# Altium PCB NBP6 Altera Stratix BGA780 Rev1.00.PcbDoc (part 3 of 3)
Units mm, origin at the board's own origin, x right, y up, seen from the top; angles counter-clockwise.
Board outline 69 x 80.99 mm, 6 copper layers (Top Layer, Upper, lower, VCC_PLANE, GND_PLANE, Bottom Layer); 92 components, 279 nets, 1271 pads, 560 vias.
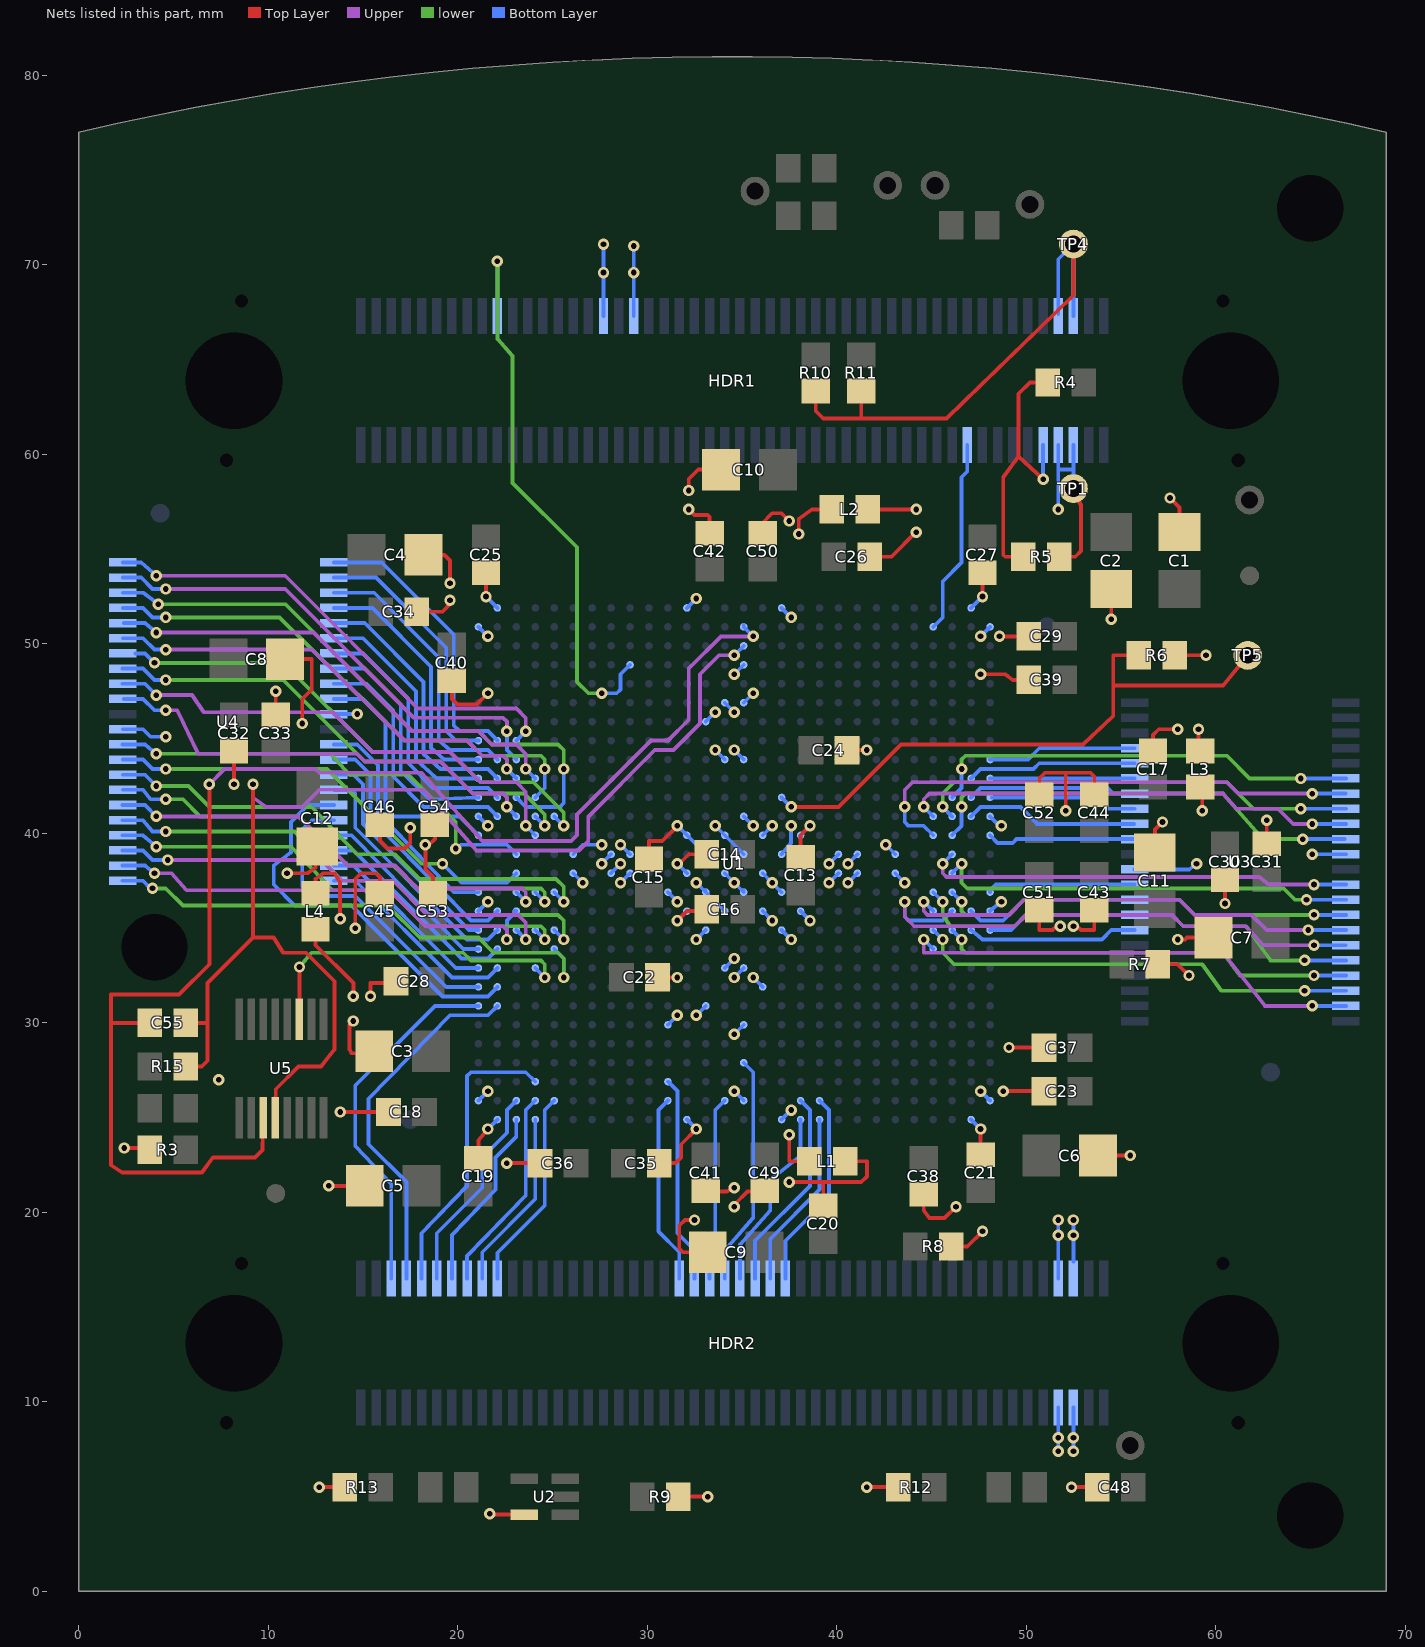
[diagram p7: the nets of this part, all layers, seen from the top]

## Via types
v1: diameter 0.6, hole 0.3, Top Layer to Bottom Layer, 560 vias

## Nets (pads, with @x,y where several pads share a name; then routed paths per layer and width w, separated by ;. In a path a pad name is that pad's centre, name@x,y a point inside that pad or via, vN(x,y) a via of type N, cw(c..) or ccw(c..) an arc to the next point about the centre after c; other vN are vias at no path point) (continued)
SRAM0_A15: U1.W4 U3.21 | length 25.1
  Upper w0.2: v1(44.6,34.4) 44.6,33.7 60.4,33.7 62.6,30.9 v1(65.1,30.9)
  Bottom Layer w0.2: v1(44.6,34.4) U1.W4@45.1,33.9 ; v1(65.1,30.9) U3.21@66.9,30.9
SRAM0_A16: U1.V4 U3.20 | length 23.9
  lower w0.2: v1(45.6,34.4) 45.6,33.7 46.2,33.1 59.3,33.1 60.3,31.7 v1(64.7,31.7)
  Bottom Layer w0.2: U1.V4@45.1,34.9 v1(45.6,34.4) ; v1@64.5,31.7 U3.20@66.9,31.7
SRAM0_A17: U1.V3 U3.19 | length 22.2
  lower w0.2: v1(46.6,34.4) 46.6,33.9 46.8,33.7 60.4,33.7 61.3,32.5 v1(65.2,32.5)
  Bottom Layer w0.2: U1.V3@46.1,34.9 v1(46.6,34.4) ; v1(65.2,32.5) U3.19@66.9,32.5
SRAM0_A18: U1.T4 U3.18 | length 24.4
  lower w0.2: v1(45.6,36.4) 45.6,35.7 46,35.1 49.4,35.1 50,35.7 57.7,35.7 58.3,35.1 61.6,35.1 62.9,33.3 v1(64.7,33.3)
  Bottom Layer w0.2: U1.T4@45.1,36.9 v1(45.6,36.4) ; v1(64.7,33.3) U3.18@66.9,33.3
SRAM0_D0: U1.N4 U3.7 | length 27.2
  Upper w0.2: v1(43.6,41.4) 43.6,42.3 44,42.7 60.6,42.7 61.2,42.1 v1(65.1,42.1)
  Bottom Layer w0.2: v1(43.6,41.4) 43.6,40.6 43.8,40.4 44.6,40.4 U1.N4@45.1,39.9 ; v1(65.1,42.1) U3.7@66.875,42.1
SRAM0_D1: U1.M3 U3.8 | length 23.5
  lower w0.2: v1(45.6,41.4) 45.6,42.1 46.2,42.7 60.6,42.7 62,41.3 v1(64.5,41.3)
  Bottom Layer w0.2: v1(45.6,41.4) U1.M3@46.1,40.9 ; v1(64.5,41.3) U3.8@66.9,41.3
SRAM0_D2: U1.M4 U3.9 | length 24.2
  Upper w0.2: v1(44.6,41.4) 44.6,41.8 44.9,42.1 60.4,42.1 61.1,41.3 63.3,41.3 64.1,40.5 v1(65.1,40.5)
  Bottom Layer w0.2: v1(44.6,41.4) U1.M4@45.1,40.9 ; v1(65.1,40.5) U3.9@66.9,40.5
SRAM0_D3: U1.N3 U3.10 | length 23.6
  lower w0.2: v1(46.6,41.4) 46.6,41.9 46.8,42.1 60.4,42.1 62.5,39.7 v1(64.6,39.7)
  Bottom Layer w0.2: U1.N3@46.1,39.9 46.6,40.4 v1(46.6,41.4) ; v1(64.6,39.7) U3.10@66.8,39.7
SRAM0_D4: U1.P3 U3.13 | length 22.7
  Upper w0.2: v1(45.6,38.4) 45.6,37.9 45.8,37.7 62.3,37.7 62.8,37.3 v1(65.2,37.3)
  Bottom Layer w0.2: v1(45.6,38.4) U1.P3@46.1,38.9 ; v1(65.2,37.3) U3.13@66.9,37.3
SRAM0_D5: U1.R3 U3.14 | length 22.4
  lower w0.2: v1(46.6,38.4) 46.6,37.4 46.9,37.1 63.6,37.1 64.2,36.5 v1(64.8,36.5)
  Bottom Layer w0.2: U1.R3@46.1,37.9 v1(46.6,38.4) ; v1(64.8,36.5) U3.14@66.9,36.5
SRAM0_D6: U1.T3 U3.15 | length 22.3
  lower w0.2: v1(46.6,36.4) 46.6,35.9 46.8,35.7 49.1,35.7 49.9,36.5 58.1,36.5 58.9,35.7 v1(65.2,35.7)
  Bottom Layer w0.2: U1.T3@46.1,36.9 v1(46.6,36.4) ; v1(65.2,35.7) U3.15@66.9,35.7
SRAM0_D7: U1.U4 U3.16 | length 24.6
  Upper w0.2: v1(44.6,36.4) 44.6,35.9 44.8,35.7 49.1,35.7 49.9,36.5 58.1,36.5 58.9,35.7 61.9,35.7 62.7,34.9 v1@64.7,34.9
  Bottom Layer w0.2: v1(44.6,36.4) U1.U4@45.1,35.9 ; v1@64.7,34.9 U3.16@66.9,34.9
  other v1: 64.9,34.9
SRAM0_D8: U1.V2 U3.29 | length 9
  Bottom Layer w0.2: U1.V2@47.1,34.9 47.7,34.4 54,34.4 54.5,34.9 U3.29@55.725,34.9
SRAM0_D9: U1.V1 U3.30 | length 8
  Bottom Layer w0.2: U1.V1@48.1,34.9 49.2,34.9 50,35.7 U3.30@55.725,35.7
SRAM0_D10: U1.U2 U3.31 | length 9.3
  Bottom Layer w0.2: U1.U2@47.1,35.9 47.6,35.4 48.8,35.4 49.9,36.5 U3.31@55.725,36.5
SRAM0_D11: U1.T1 U3.32 | length 7.8
  Bottom Layer w0.2: U1.T1@48.1,36.9 48.1,37 48.4,37.3 U3.32@55.725,37.3
SRAM0_D12: U1.N1 U3.35 | length 7.9
  Bottom Layer w0.2: U1.N1@48.1,39.9 48.5,39.5 49.3,39.5 49.5,39.7 55.625,39.7 U3.35@55.725,39.7
SRAM0_D13: U1.M2 U3.36 | length 9.2
  Bottom Layer w0.2: U1.M2@47.1,40.9 47.6,41.4 49.7,41.4 50.6,40.5 ; 50.575,40.5 U3.36@55.7,40.5
SRAM0_D14: U1.L1 U3.37 | length 7.8
  Bottom Layer w0.2: U1.L1@48.2,41.9 53.7,41.9 54.3,41.3 U3.37@55.725,41.3
SRAM0_D15: U1.L2 U3.38 | length 9
  Bottom Layer w0.2: U1.L2@47.1,41.9 47.6,42.4 54.3,42.4 54.6,42.1 U3.38@55.725,42.1
SRAM0_E: U1.L3 U3.6 | length 23.1
  lower w0.2: v1(46.6,43.4) 46.6,43.9 46.8,44.1 60.6,44.1 61.8,42.9 v1(64.5,42.9)
  Bottom Layer w0.2: U1.L3@46.1,41.9 46.6,42.4 v1(46.6,43.4) ; v1(64.5,42.9) U3.6@66.9,42.9
SRAM0_LB: U1.K1 U3.39 | length 7.6
  Bottom Layer w0.2: U1.K1@48.1,42.9 U3.39@55.725,42.9
SRAM0_OE: U1.J1 U3.41 | length 7.9
  Bottom Layer w0.2: U1.J1@48.1,43.9 50.1,43.9 50.7,44.5 U3.41@55.725,44.5
SRAM0_UB: U1.K2 U3.40 | length 9
  Bottom Layer w0.2: U1.K2@47.1,42.9 47.6,43.4 50.4,43.4 50.7,43.7 U3.40@55.725,43.7
SRAM0_W: U1.U3 U3.17 | length 28.8
  Upper w0.2: v1(43.6,36.4) 43.6,35.6 44.1,35.1 49.4,35.1 50,35.7 57.7,35.7 58.3,35.1 61.6,35.1 62.5,34.1 v1(65.2,34.1)
  Bottom Layer w0.2: v1(43.6,36.4) 43.6,35.6 43.8,35.4 45.6,35.4 U1.U3@46.1,35.9 ; v1(65.2,34.1) U3.17@66.875,34.1
SRAM1_A0: U1.K27 U4.5 | length 14.2
  Bottom Layer w0.2: U4.5@13.475,51.1 15.1,51.1 18.2,48 18.2,44.2 19.1,43.4 21.6,43.4 U1.K27@22.1,42.9
SRAM1_A1: U1.J28 U4.4 | length 13.4
  Bottom Layer w0.2: U4.4@13.475,51.9 15.5,51.9 18.6,48.8 18.6,44.5 19.3,43.9 U1.J28@21.1,43.9
SRAM1_A2: U1.J27 U4.3 | length 14.8
  Bottom Layer w0.2: U4.3@13.475,52.7 15.6,52.7 19,49.3 19,44.9 19.6,44.4 21.6,44.4 U1.J27@22.1,43.9
SRAM1_A3: U1.H28 U4.2 | length 13.8
  Bottom Layer w0.2: U4.2@13.475,53.5 15.7,53.5 19.4,49.8 19.4,45.4 19.9,44.9 U1.H28@21.1,44.9
SRAM1_A4: U1.H27 U4.1 | length 15.3
  Bottom Layer w0.2: U4.1@13.475,54.3 16,54.3 19.8,50.5 19.8,45.7 20.1,45.4 21.6,45.4 U1.H27@22.1,44.9
SRAM1_A5: U1.H26 U4.44 | length 26.1
  Upper w0.2: v1(4.1,53.6) 10.9,53.6 17.9,46.6 23.1,46.6 23.6,46.1 v1(23.6,45.4)
  Bottom Layer w0.2: U4.44@2.325,54.3 3.3,54.3 v1(4.1,53.6) ; U1.H26@23.1,44.9 v1(23.6,45.4)
SRAM1_A6: U1.J26 U4.43 | length 25.7
  Top Layer w0.2: v1(4.6,52.9) v1@4.7,52.9
  Upper w0.2: v1(4.6,52.9) 10.9,52.9 17.7,46.1 22.4,46.1 22.6,45.9 v1(22.6,45.4)
  Bottom Layer w0.2: U4.43@2.325,53.5 3.3,53.5 3.9,52.9 v1(4.6,52.9) ; v1(22.6,45.4) 22.6,44.4 U1.J26@23.1,43.9
SRAM1_A7: U1.L26 U4.42 | length 32.2
  lower w0.2: v1(4.2,52.1) 10.9,52.1 17.6,45.4 21.1,45.4 21.8,44.7 25.3,44.7 25.6,44.4 v1(25.6,43.4)
  Bottom Layer w0.2: U4.42@2.325,52.7 3.4,52.7 v1(4.2,52.1) ; U1.L26@23.1,41.9 23.6,41.4 25.4,41.4 25.6,41.6 v1@25.6,43.3
SRAM1_A8: U1.T26 U4.28 | length 24.4
  Upper w0.2: v1(4.1,40.9) 8.9,40.9 11.6,40.9 14.2,38.3 16.7,38.3 17.9,37.1 23.4,37.1 23.6,36.9 v1(23.6,36.4)
  Bottom Layer w0.2: U4.28@2.3,41.5 3.5,41.5 v1(4.1,40.9) ; U1.T26@23.1,36.9 v1(23.6,36.4)
SRAM1_A9: U1.V24 U4.27 | length 27.3
  lower w0.2: v1(4.6,40.1) 11.4,40.1 13.9,37.5 16.6,37.5 18.4,35.7 25.3,35.7 25.6,35.4 v1(25.6,34.4)
  Bottom Layer w0.2: U4.27@2.3,40.7 3.4,40.7 3.9,40.1 v1(4.6,40.1) ; U1.V24@25.1,34.9 v1(25.6,34.4)
SRAM1_A10: U1.V25 U4.26 | length 25.6
  lower w0.2: v1(4.1,39.3) 11.2,39.3 13.4,37 16.4,37 18.3,35.1 24.4,35.1 24.6,34.9 v1(24.6,34.4)
  Bottom Layer w0.2: U4.26@2.3,39.9 3.4,39.9 v1(4.1,39.3) ; U1.V25@24.1,34.9 v1(24.6,34.4)
SRAM1_A11: U1.V26 U4.25 | length 24.5
  Upper w0.2: v1(4.7,38.6) 12.8,38.6 13.9,37.5 16.6,37.5 18.4,35.7 23.2,35.7 23.6,35.3 v1(23.6,34.4)
  Bottom Layer w0.2: U4.25@2.3,39.1 3.4,39.1 3.9,38.6 v1(4.7,38.6) ; U1.V26@23.1,34.9 v1(23.6,34.4)
SRAM1_A12: U1.U26 U4.24 | length 24
  Upper w0.2: v1(4,37.9) 4.9,37.9 5.7,37 12.9,37 16.4,37 18.3,35.1 22.4,35.1 22.6,34.9 v1(22.6,34.4)
  Bottom Layer w0.2: U4.24@2.3,38.3 3.5,38.3 v1(4,37.9) ; v1(22.6,34.4) 22.6,35.4 U1.U26@23.1,35.9 U1.U26@23,35.9
SRAM1_A13: U1.W24 U4.23 | length 35.9
  lower w0.2: v1(3.9,37.1) 4.6,37.1 5.5,36.2 16.3,36.2 ; v1(25.6,32.4) 25.6,33.4 25.3,33.7 21.9,33.7 21.1,34.5 18,34.5 16.3,36.2 ; 16.3,36.2 12.2,36.2 16.3,36.2
  Bottom Layer w0.2: U4.23@2.3,37.5 3.4,37.5 3.8,37.1 v1(3.9,37.1) ; U1.W24@25.1,33.9 25.6,33.4 v1(25.6,32.4)
SRAM1_A14: U1.Y27 U4.22 | length 10.9
  Bottom Layer w0.2: U4.22@13.475,37.5 14.6,37.5 19.7,32.4 21.6,32.4 U1.Y27@22.1,32.9
SRAM1_A15: U1.Y28 U4.21 | length 9.9
  Bottom Layer w0.2: U4.21@13.475,38.3 14.5,38.3 19.9,32.9 U1.Y28@21.1,32.9
SRAM1_A16: U1.W27 U4.20 | length 11.2
  Bottom Layer w0.2: U4.20@13.475,39.1 14.5,39.1 20.2,33.4 21.6,33.4 U1.W27@22.1,33.9
SRAM1_A17: U1.W28 U4.19 | length 10.1
  Bottom Layer w0.2: U4.19@13.475,39.9 13.575,39.9 14.4,39.9 20.3,33.9 U1.W28@21.1,33.9
SRAM1_A18: U1.AA28 U4.18 | length 16.4
  Bottom Layer w0.2: U4.18@13.475,40.7 12.3,40.7 11.8,40.2 11.8,37.2 12.275,36.725 12.275,36.7 14.6,36.7 19.4,31.9 U1.AA28@21.1,31.9
SRAM1_D0: U1.L27 U4.7 | length 13.8
  Bottom Layer w0.2: U4.7@13.475,49.5 15,49.5 17.4,47.1 17.4,43.7 18.7,42.4 21.6,42.4 U1.L27@22.1,41.9
SRAM1_D1: U1.L28 U4.8 | length 12.5
  Bottom Layer w0.2: U4.8@13.475,48.7 15.1,48.7 17,46.8 17,43.3 18.5,41.8 U1.L28@21.1,41.9
SRAM1_D2: U1.M27 U4.9 | length 13.6
  Bottom Layer w0.2: U4.9@13.475,47.9 15.2,47.9 16.6,46.5 16.6,43 18.2,41.4 21.6,41.4 U1.M27@22.1,40.9
SRAM1_D3: U1.N28 U4.10 | length 13.3
  Bottom Layer w0.2: U4.10@13.475,47.1 15,47.1 16.2,45.9 16.2,41.3 16.6,40.9 20.1,40.9 U1.N28@21.1,39.9
SRAM1_D4: U1.T28 U4.13 | length 12.4
  Bottom Layer w0.2: U4.13@13.475,44.7 14.7,44.7 15.8,43.6 15.8,41.1 19.8,36.9 U1.T28@21.1,36.9
SRAM1_D5: U1.U27 U4.14 | length 13.7
  Bottom Layer w0.2: U4.14@13.475,43.9 14.6,43.9 15.4,43.1 15.4,40.8 20.7,35.4 21.6,35.4 U1.U27@22.1,35.9
SRAM1_D6: U1.V28 U4.15 | length 12.3
  Bottom Layer w0.2: U4.15@13.475,43.1 14.5,43.1 15,42.6 15,40.5 20.6,34.9 U1.V28@21.1,34.9
SRAM1_D7: U1.V27 U4.16 | length 13.2
  Bottom Layer w0.2: U4.16@13.475,42.3 14.4,42.3 14.6,42.1 14.6,40.3 20.5,34.4 21.6,34.4 U1.V27@22.1,34.9
SRAM1_D8: U1.T25 U4.29 | length 25.7
  lower w0.2: v1(4.6,41.8) 5.5,41.8 6.4,40.9 11.6,40.9 14.2,38.3 16.6,38.3 17.9,37.1 24.4,37.1 24.6,36.9 v1(24.6,36.4)
  Bottom Layer w0.2: U4.29@2.325,42.3 3.4,42.3 3.8,41.8 v1(4.6,41.8) ; U1.T25@24.1,36.9 v1(24.6,36.4)
SRAM1_D9: U1.T24 U4.30 | length 27.3
  lower w0.2: v1(4.1,42.5) 5.8,42.5 6.9,41.4 12.3,41.4 14.7,38.9 16.7,38.9 18,37.6 25.2,37.6 25.6,37.2 v1(25.6,36.4)
  Bottom Layer w0.2: U4.30@2.325,43.1 3.5,43.1 v1(4.1,42.5) ; U1.T24@25.1,36.9 v1(25.6,36.4)
SRAM1_D10: U1.R26 U4.31 | length 23.7
  lower w0.2: v1(4.6,43.4) 13.1,43.4 18.1,38.4 v1(19.2,38.4)
  Bottom Layer w0.2: U4.31@2.325,43.9 3.4,43.9 3.9,43.4 v1(4.6,43.4) ; v1(19.2,38.4) 20.2,37.4 22.6,37.4 U1.R26@23.1,37.9
SRAM1_D11: U1.P26 U4.32 | length 24.2
  lower w0.2: v1(4.1,44.2) 13.3,44.2 14.3,43.1 17.4,43.1 19.9,40.6 v1(19.9,39.2)
  Bottom Layer w0.2: U4.32@2.3,44.7 3.5,44.7 v1(4.1,44.2) ; v1(19.9,39.2) 20.2,39.4 22.6,39.4 U1.P26@23.1,38.9
SRAM1_D12: U1.M26 U4.35 | length 24
  Upper w0.2: v1@4.584,46.516 4.6,46.516 5.2,46.5 6.3,44.2 9,44.2 14.7,44.2 15.1,43.8 19.1,43.8 20.8,42.1 22.4,42.1 22.6,41.9 v1(22.6,41.4)
  Bottom Layer w0.2: U4.35@2.4,47.1 3.4,47.1 4,46.5 v1@4.5,46.5 ; v1(22.6,41.4) U1.M26@23.1,40.9
  other v1: 4.6,46.5
SRAM1_D13: U1.N25 U4.36 | length 26.4
  Top Layer w0.2: v1@4,47.3 v1(4.1,47.3)
  Upper w0.2: v1(4.1,47.3) 6,47.3 6.6,46.4 13.4,46.4 15.5,44.3 19.6,44.3 21.2,42.7 23.1,42.7 23.6,42.2 v1(23.6,40.4)
  Bottom Layer w0.2: U4.36@2.3,47.9 3.5,47.9 v1(4.1,47.3) ; v1(23.6,40.4) U1.N25@24.1,39.9
SRAM1_D14: U1.M25 U4.37 | length 26.8
  lower w0.2: v1(4.6,48.1) 10.8,48.1 15.1,43.8 19.1,43.8 20.8,42.1 23.5,42.1 24.6,41 v1(24.6,40.4)
  Bottom Layer w0.2: U4.37@2.3,48.7 3.4,48.7 4,48.1 v1(4.6,48.1) ; U1.M25@24.1,40.9 v1(24.6,40.4)
SRAM1_D15: U1.M24 U4.38 | length 27.5
  lower w0.2: v1(4,49) 10.8,49 15.5,44.3 19.6,44.3 21.2,42.7 24,42.7 25.6,41.1 v1(25.6,40.4)
  Bottom Layer w0.2: U4.38@3,49.5 3.5,49.5 v1(4,49) ; U1.M24@25.1,40.9 v1(25.6,40.4)
SRAM1_E: U1.K28 U4.6 | length 12.8
  Bottom Layer w0.2: U4.6@13.475,50.3 15,50.3 17.8,47.5 17.8,43.9 18.9,42.9 U1.K28@21.1,42.9
SRAM1_LB: U1.K26 U4.39 | length 24.1
  Upper w0.2: v1(4.6,49.7) 12.3,49.7 17.2,44.9 20.5,44.9 21.3,44.1 22.4,44.1 22.6,43.9 22.6,43.8 v1(22.6,43.4)
  Bottom Layer w0.2: U4.39@2.325,50.3 3.4,50.3 4,49.7 v1(4.6,49.7) ; v1(22.6,43.4) U1.K26@23.1,42.9
SRAM1_OE: U1.L25 U4.41 | length 27.8
  lower w0.2: v1(4.6,51.4) 10.6,51.4 17.2,44.9 20.5,44.9 21.3,44.1 24.4,44.1 24.6,43.9 v1(24.6,43.4)
  Bottom Layer w0.2: U4.41@2.325,51.9 3.4,51.9 3.9,51.4 v1(4.6,51.4) ; U1.L25@24.1,41.9 24.6,42.4 v1(24.6,43.4)
SRAM1_UB: U1.K25 U4.40 | length 25.5
  Upper w0.2: v1(4.1,50.6) 12.4,50.6 17.6,45.4 21.1,45.4 21.8,44.7 23.1,44.7 23.6,44.2 v1(23.6,43.4)
  Bottom Layer w0.2: U4.40@2.4,51.1 3.5,51.1 v1(4.1,50.6) ; v1(23.6,43.4) U1.K25@24.1,42.9
SRAM1_W: U1.AA27 U4.17 | length 21.1
  Bottom Layer w0.2: U4.17@13.475,41.5 12.1,41.5 11.2,40.6 11.2,39 10.3,38.3 10.3,37.3 11.4,36.2 14.4,36.2 19.2,31.4 21.6,31.4 U1.AA27@22.1,31.9 ; U1.AA27@22.1,31.9 22,31.8 U1.AA27@22.1,31.9
SW0: HDR2.44 U1.AG18 | length 10.1
  Bottom Layer w0.2: U1.AG18@31.1,25.9 30.6,25.4 30.6,19 31.7,17.9 HDR2.44@31.7,16.5
SW1: HDR2.46 U1.AF18 | length 11
  Bottom Layer w0.2: U1.AF18@31.1,26.9 31.6,26.4 31.6,18.9 32.5,18 HDR2.46@32.5,16.5
SW2: HDR2.48 U1.AG15 | length 9.7
  Bottom Layer w0.2: HDR2.48@33.3,16.5 33.3,17.9 33.6,18.2 33.6,25.4 U1.AG15@34.1,25.9
SW3: HDR2.50 U1.AE14 | length 12.2
  Bottom Layer w0.2: HDR2.50@34.1,16.5 34.1,18 35.6,19.7 35.6,27.4 U1.AE14@35.1,27.9
SW4: HDR2.52 U1.AH11 | length 9.8
  Bottom Layer w0.2: HDR2.52@34.9,16.5 34.9,18.3 36.5,20.1 36.5,21.7 38.1,23 U1.AH11@38.1,24.9
SW5: HDR2.54 U1.AG11 | length 10.8
  Bottom Layer w0.2: HDR2.54@35.7,16.5 35.7,18.5 38.6,21.4 38.6,25.4 U1.AG11@38.1,25.9
SW6: HDR2.56 U1.AH10 | length 9.5
  Bottom Layer w0.2: HDR2.56@36.5,16.5 36.5,18.6 39.1,21.2 U1.AH10@39.1,24.9
SW7: HDR2.58 U1.AG10 | length 10.6
  Bottom Layer w0.2: HDR2.58@37.3,16.5 37.3,18.5 39.6,20.8 39.6,25.4 U1.AG10@39.1,25.9
SWC0: HDR2.18 U1.AH25 | length 9.6
  Bottom Layer w0.2: HDR2.18@21.3,16.5 21.3,17.9 24.1,20.7 U1.AH25@24.1,24.9
SWC1: HDR2.16 U1.AG25 | length 13.6
  Bottom Layer w0.2: HDR2.16@20.5,16.5 20.5,17.7 23.6,20.9 23.6,25.4 ; 23.6,22.7 23.6,25.4 ; U1.AG25@24.1,25.9 23.6,25.4
SWC2: HDR2.14 U1.AH26 | length 9.8
  Bottom Layer w0.2: HDR2.14@19.7,16.5 19.7,18.7 19.7,18.8 22,21.2 22,22.9 23.1,24 U1.AH26@23.1,24.9
SWC3: HDR2.6 U1.AB28 | length 19.2
  Bottom Layer w0.2: HDR2.6@16.5,16.5 16.5,21.5 14.6,23.5 14.6,26.7 18.8,30.9 U1.AB28@21.1,30.9
SWR0: HDR2.20 U1.AG24 | length 10.6
  Bottom Layer w0.2: HDR2.20@22.1,16.5 22.1,17.871 24.6,20.371 24.6,25.4 U1.AG24@25.1,25.9
SWR1: HDR2.12 U1.AG26 | length 11.1
  Bottom Layer w0.2: HDR2.12@18.9,16.5 18.9,18.9 21.3,21.3 21.3,22.9 22.6,24.2 22.6,25.4 U1.AG26@23.1,25.9
SWR2: HDR2.10 U1.AF25 | length 15.6
  Bottom Layer w0.2: HDR2.10@18.1,16.5 18.1,18.9 20.5,21.4 20.5,27.2 20.7,27.4 23.6,27.4 U1.AF25@24.1,26.9
SWR3: HDR2.8 U1.AB27 | length 19.2
  Bottom Layer w0.2: HDR2.8@17.3,16.5 17.3,21.6 15.3,23.6 15.3,26 19.6,30.4 21.6,30.4 U1.AB27@22.1,30.9
TEMP_ALERT: U1.Y25 U5.11 | length 17.7
  Top Layer w0.2: U5.11@11.652,30.2 v1(11.652,32.948)
  lower w0.2: v1(11.652,32.948) 12.3,33.7 20.3,33.7 20.7,33.3 24.4,33.3 24.6,33.1 v1(24.6,32.4)
  Bottom Layer w0.2: U1.Y25@24.1,32.9 v1(24.6,32.4)
TEMPDIODEN: C55.1 R15.2 U1.C14 U5.4 | length 66.8
  Top Layer w0.2: C55.1@5.6,30 6.8,30 ; R15.2@5.65,27.7 6.5,27.7 6.8,28 6.8,32.1 9.2,34.5 ; v1(9.2,42.6) 9.2,34.5 ; 10.382,26.1 10.4,26.2 10.4,26.5 11.6,27.7 12.8,27.7 13.5,28.6 13.5,32.2 12,33.7 10.8,33.7 10.3,34.5 9.2,34.5
  Upper w0.2: v1(9.2,42.6) 9.2,41.9 9.9,41.4 11.8,41.4 12.7,42.3 18.2,42.3 21,39.1 26.4,39.1 26.9,39.6 26.9,40.9 30.4,44.4 31.4,44.4 32.8,45.8 32.8,48.4 33.8,49.4 v1(34.6,49.4)
  Bottom Layer w0.2: v1(34.6,49.4) U1.C14@35.1,49.9
TEMPDIODEP: C55.2 U1.B14 U5.3 | length 75.1
  Top Layer w0.2: 1.7,30 C55.2@3.8,30 ; v1(6.9,42.6) 6.9,33.1 5.3,31.5 1.7,31.5 1.7,22.5 2.3,22.1 6.5,22.1 7.1,22.9 9.3,22.9 9.7,23.3 U5.3@9.747,25
  Upper w0.2: v1(6.9,42.6) 7.7,43.4 12.5,43.4 12.7,43.2 18.1,43.2 21.3,39.6 26,39.6 26.3,39.9 26.3,41 30.2,44.9 31.1,44.9 32.2,46 32.2,48.7 33.9,50.4 v1(35.6,50.4)
  Bottom Layer w0.2: U1.B14@35.1,51 U1.B14@35.1,50.9 v1(35.6,50.4)
TEST: HDR1.81 U1.B4 | length 10.3
  Bottom Layer w0.2: U1.B4@45.1,50.9 45.6,51.4 45.6,52.6 45.6,53.3 46.6,54.3 46.6,58.6 46.6,58.8 46.9,59.1 HDR1.81@46.9,60.5
TRST: R6.2 TP5.1 U1.L12 | length 32.1
  Top Layer w0.2: v1(37.6,41.4) 40.1,41.4 43.4,44.7 53,44.7 54.6,46.2 54.6,49.4 R6.2@55.95,49.4 ; 54.6,47.8 60.4,47.8 TP5.1@61.7,49.4
  Bottom Layer w0.2: U1.L12@37.1,41.9 v1(37.6,41.4)
VCC: C2.1 C4.1 C5.1 C6.1 C7.1 C8.1 C18.1 C19.1 C21.1 C23.1 C25.1 C27.1 C29.1 C30.1 C31.1 C32.1 C33.1 C34.1 C35.1 C36.1 C37.1 C38.1 C39.1 C40.1 C48.1 HDR1.34 HDR1.38 HDR1.94 HDR1.96 HDR2.94 HDR2.96 R3.1 R6.1 R7.1 R8.2 R9.1 R10.1 R11.1 R12.1 R13.1 TP4.1 U1.A2 U1.A12 U1.A17 U1.A27 U1.AA13 U1.AB16 U1.AC14 U1.AC18 U1.AG1 U1.AG28 U1.AH2 U1.AH12 U1.AH17 U1.AH27 U1.B1 U1.B28 U1.D14 U1.F15 U1.G16 U1.J14 U1.J15 U1.M1 U1.M28 U1.P8 U1.P9 U1.P20 U1.P21 U1.R8 U1.R9 U1.R20 U1.R21 U1.U1 U1.U28 U1.Y14 U1.Y15 U2.5 U3.11 U3.33 U4.11 U4.33 | length 139.1
  Top Layer w0.2: v1(2.4,23.4) R3.1@3.7,23.4 ; v1(8.2,42.6) C32.1@8.2,44.35 ; C33.1@10.4,46.25 v1(10.4,47.5) ; C8.1@10.9,49.2 12.3,49.2 12.3,47.6 11.8,47.1 v1(11.8,45.8) ; v1(12.7,5.5) R13.1@14.05,5.5 ; v1(13.2,21.4) C5.1@15.1,21.4 ; v1(13.8,25.3) C18.1@16.3,25.3 ; C34.1@17.85,51.7 19.2,51.7 19.6,52.1 v1(19.6,52.3) ; C4.1@18.2,54.7 19.3,54.7 19.6,54.4 v1(19.6,53.2) ; C40.1@19.7,48.05 19.7,47.1 20,46.8 21,46.8 v1(21.6,47.4) ; C19.1@21.1,22.85 21.1,23.8 v1(21.6,24.4) ; v1@21.5,52.75 C25.1@21.5,53.75 ; v1(21.7,4.1) 21.75,4.05 U2.5@23.525,4.05 ; v1@22.8,22.6 23.4,22.6 C36.1@24.35,22.6 ; C35.1@30.6,22.6 31.5,22.6 31.8,22.9 31.8,23.6 v1(32.6,24.4) ; R9.1@31.8,5 v1(33.2,5) ; R10.1@38.9,63.35 38.9,62.3 39.3,61.9 45.8,61.9 52.5,68.4 TP4.1@52.5,71.1 ; 41.3,61.9 R11.1@41.3,63.35 ; v1(41.6,5.5) R12.1@43.25,5.5 ; C38.1@44.6,20.95 44.6,20.1 44.9,19.7 45.7,19.7 v1(46.3,20.3) ; R8.2@46.35,18.2 46.9,18.2 v1(47.7,19) ; v1@47.6,24.2 C21.1@47.6,23.05 C21.1@47.7,23.15 ; v1(47.6,48.4) 48.9,48.4 49.3,48.1 C39.1@50.15,48.1 ; v1(47.7,52.5) C27.1@47.7,53.8 ; v1(48.6,50.4) C29.1@50.15,50.4 ; v1(48.8,26.4) C23.1@50.9,26.4 ; v1@49.4,28.7 C37.1@50.5,28.7 ; v1(52.4,5.5) C48.1@53.7,5.5 ; C6.1@53.7,23 v1@55.3,23 ; v1(54.5,51.3) C2.1@54.5,52.9 ; R7.1@56.95,33.1 58,33.1 v1(58.6,32.5) ; R6.1@57.85,49.4 v1(59.5,49.4) ; v1(58,34.4) 58.4,34.4 58.5,34.5 C7.1@59.9,34.5 ; v1(60.5,36.3) C30.1@60.5,37.55 ; C31.1@62.7,39.45 v1(62.7,40.7)
  Bottom Layer w0.2: U4.33@2.325,45.5 3.4,45.5 3.8,45.1 v1(4.6,45.1) ; U4.11@13.475,46.3 v1(14.7,46.3) ; U1.AG28@21.1,25.9 v1(21.6,26.4) ; U1.U28@21.1,35.9 v1(21.6,36.4) ; U1.M28@21.1,40.9 v1(21.6,40.4) ; U1.B28@21.1,50.9 v1(21.6,50.4) ; v1(21.5,52.5) U1.A27@22.1,51.9 ; v1(21.6,24.4) U1.AH27@22.1,24.9 ; v1(27.6,38.4) U1.P21@28.1,38.9 ; HDR1.34@27.7,67.3 v1(27.7,69.6) v1(27.7,71.1) ; U1.R21@28.1,37.9 v1(28.6,38.4) ; v1(28.6,37.4) U1.R20@29.1,37.9 ; v1(28.6,39.4) U1.P20@29.1,38.9 ; HDR1.38@29.3,67.3 v1(29.3,71) ; U1.AC18@31.1,29.9 v1(31.6,30.4) ; U1.AH17@32.1,24.9 v1(32.6,24.4) ; U1.A17@32.1,51.9 v1(32.6,52.4) ; v1(32.6,30.4) U1.AB16@33.1,30.9 ; U1.G16@33.1,45.9 v1(33.6,46.4) ; v1(33.6,44.4) U1.J15@34.1,43.9 ; U1.Y15@34.1,32.9 v1(34.6,33.4) ; U1.F15@34.1,46.9 v1(34.6,46.4) ; v1(34.6,29.4) U1.AC14@35.1,29.9 ; v1(34.6,32.4) U1.Y14@35.1,32.9 ; v1(34.6,44.4) U1.J14@35.1,43.9 ; v1(34.6,48.4) U1.D14@35.1,48.9 ; v1(35.6,32.4) U1.AA13@36.1,31.9 ; U1.AH12@37.1,24.9 v1(37.6,25.4) ; U1.A12@37.1,51.9 v1(37.6,51.4) ; v1(39.6,37.4) U1.R9@40.1,37.9 ; v1(39.6,38.4) U1.P9@40.1,38.9 ; v1(40.6,37.4) U1.R8@41.1,37.9 ; v1(40.6,38.4) U1.P8@41.1,38.9 ; U1.AH2@47.1,24.9 v1(47.6,24.4) v1@47.6,24.2 ; U1.A2@47.1,51.9 v1(47.7,52.5) ; v1(47.6,26.4) U1.AG1@48.1,25.9 ; v1(47.6,50.4) U1.B1@48.1,50.9 ; U1.U1@48.1,35.9 v1(48.7,36.4) ; U1.M1@48.1,40.9 48.6,40.4 v1(48.7,40.4) ; HDR2.94@51.7,16.5 v1(51.7,19.6) ; HDR1.94@51.7,67.4 51.7,69.7 51.7,70.3 TP4.1@52.5,71.1 HDR1.96@52.5,67.3 ; HDR2.96@52.5,17.4 v1(52.5,19.6) ; U3.33@55.725,38.1 58,38.1 58.6,38.1 v1(59,38.4) ; v1(65.1,38.9) U3.11@66.9,38.9
  other v1: 51.7,18.8 52.5,18.8 22.6,22.6 55.5,23 7.4,27 49.1,28.7 29.3,69.6
VCCA_PLL1: C12.1 C45.1 C46.1 C53.1 C54.1 L4.2 U1.P23 U1.R23 | length 22.1
  Top Layer w0.2: v1@11,37.7 v1(11,37.9) 12.1,37.9 12.5,38.2 C12.1@12.5,39.1 ; L4.2@12.5,36.85 12.5,37.6 12.9,37.9 13.5,37.9 13.8,37.4 v1(13.8,35.5) ; v1(14.6,35) 14.6,37.6 14.9,37.9 15.7,37.9 15.9,37.7 C45.1@15.9,36.85 ; C46.1@15.9,40.45 15.9,39.6 16.3,39.2 17.2,39.2 17.5,39.5 v1(17.5,40.3) ; C53.1@18.7,36.85 18.7,37.7 18.3,38.1 v1(18.3,39.4) 18.5,39.4 18.8,39.7 C54.1@18.8,40.5
  Bottom Layer w0.2: U1.R23@26.1,37.9 v1(26.6,37.4) ; U1.P23@26.1,38.9 26.6,39.4 v1(27.6,39.4)
VCCA_PLL3: C11.1 C43.1 C44.1 C51.1 C52.1 L3.2 U1.P6 U1.R6 | length 15.7
  Top Layer w0.2: C51.1@50.7,35.95 50.7,34.9 51.4,34.9 51.6,35.1 v1(51.8,35.1) ; C52.1@50.7,42.05 50.7,42.9 51,43.2 53.4,43.2 53.6,43 C44.1@53.6,42.05 ; v1(52.1,41.2) 52.1,43.2 ; v1(52.5,35.1) 52.7,35.1 52.9,34.9 53.6,34.9 C43.1@53.6,35.95 ; C11.1@56.8,39.1 56.8,40.2 v1(57.2,40.6) ; v1(59.3,41.2) L3.2@59.3,42.45
  Bottom Layer w0.2: v1(42.6,39.4) U1.P6@43.1,38.9 ; U1.R6@43.1,37.9 v1(43.6,37.4)
VCCA_PLL5: C10.1 C42.1 C50.1 L2.2 U1.F14 | length 10.6
  Top Layer w0.2: v1(32.2,57.1) 32.5,56.8 33.2,56.8 33.3,56.7 C42.1@33.3,55.9 ; v1(32.2,58.1) 32.2,58.7 32.7,59.2 C10.1@33.9,59.2 ; C50.1@36.1,55.8 36.1,56.4 36.6,56.9 37.1,56.9 37.6,56.4 v1(37.51,56.49) ; v1(38,55.8) 38,56.6 38.7,57.1 L2.2@39.75,57.1
  Bottom Layer w0.2: U1.F14@35.1,46.9 v1(35.6,47.4)
VCCA_PLL6: C9.1 C41.1 C49.1 L1.2 U1.AG14 | length 11.4
  Top Layer w0.2: v1(32.5,19.6) 32,19.6 31.7,19.3 31.7,18.1 31.9,17.9 C9.1@33.2,17.9 C9.1@33.2,18.9 ; C41.1@33.1,21.1 34.2,21.1 v1(34.6,21.3) ; v1(34.6,20.3) 34.6,20.4 35.3,21.1 C49.1@36.2,21.1 ; v1(37.5,24.1) 37.5,22.7 L1.2@38.55,22.7
  Bottom Layer w0.2: v1(34.6,26.4) U1.AG14@35.1,25.9
VCCINT: C1.1 C3.1 C13.1 C14.1 C15.1 C16.1 C17.1 C20.1 C22.1 C24.1 C26.1 C28.1 HDR1.93 HDR1.95 HDR2.93 HDR2.95 L1.1 L2.1 L3.1 L4.1 R5.1 TP1.1 U1.M14 U1.N11 U1.N13 U1.N15 U1.N17 U1.P12 U1.P14 U1.P16 U1.R13 U1.R15 U1.R17 U1.T12 U1.T14 U1.T16 U1.T18 U1.U11 U1.U13 U1.U15 U1.U17 U1.V12 U1.V16 | length 71.9
  Top Layer w0.2: L4.1@12.5,34.95 12.5,34.1 14.5,32.1 v1(14.5,31.4) ; v1(14.5,30.1) 14.3,29.9 14.3,28.6 14.4,28.4 C3.1@15.6,28.4 ; v1(15.4,31.4) 15.4,32.1 15.7,32.1 C28.1@16.7,32.1 ; C15.1@30.1,38.65 30.1,39.6 30.8,39.6 v1(31.6,40.4) ; C22.1@30.6,32.4 v1(31.6,32.4) ; v1(31.6,35.4) 32.1,35.9 C16.1@33.15,35.9 ; v1(31.6,38.4) 31.7,38.4 32.2,38.9 C14.1@33.15,38.9 ; v1(37.5,21.6) 41.3,21.6 41.6,21.9 41.6,22.7 L1.1@40.45,22.7 ; C13.1@38.1,38.75 38.1,39.9 v1(38.6,40.4) ; C20.1@39.3,20.35 39.3,21.6 ; C24.1@40.6,44.4 v1(41.6,44.4) ; L2.1@41.7,57.1 v1(44.2,57.1) ; C26.1@41.75,54.6 42.9,54.6 v1(44.2,55.9) ; R5.1@51.7,54.65 R5.1@51.75,54.6 52.6,54.6 52.9,54.9 52.9,56.5 52.9,57.3 TP1.1@52.5,58.2 ; C17.1@56.7,44.4 56.7,45.2 57,45.5 v1(58,45.5) ; v1(57.6,57.7) 58.1,57.2 C1.1@58.1,55.9 ; L3.1@59.1,44.35 v1(59.1,45.5)
  Bottom Layer w0.2: U1.T18@31.1,36.9 v1(31.6,36.4) ; v1(31.6,35.4) U1.U17@32.1,35.9 ; v1(31.6,38.4) U1.R17@32.1,37.9 ; v1(31.6,40.4) U1.N17@32.1,39.9 U1.P16@33.1,38.9 ; v1(32.6,34.4) U1.V16@33.1,34.9 ; v1(32.6,37.4) U1.T16@33.1,36.9 ; U1.T16@33.1,37 U1.T16@33.1,36.9 ; v1(33.6,40.4) U1.N15@34.1,39.9 U1.P14@35.1,38.9 ; U1.U15@34.1,35.9 U1.T16@33.1,36.9 ; U1.R15@34.1,37.9 v1(34.6,37.4) ; v1@34.7,37.4 v1(34.6,37.4) ; U1.T14@35.1,37 U1.T14@35.1,36.9 v1(34.6,37.4) ; U1.M14@35.1,40.9 v1(35.6,40.4) ; U1.U13@36.1,35.9 v1(36.6,35.4) ; U1.R13@36.1,37.9 v1(36.6,37.4) U1.T12@37.1,36.9 ; U1.N13@36.1,39.9 v1(36.6,40.4) ; U1.V12@37.1,34.9 v1(37.6,34.4) ; U1.P12@37.1,38.9 37.6,39.5 v1(37.6,40.4) ; U1.U11@38.1,35.9 v1(38.6,35.4) ; U1.N11@38.1,39.9 v1(38.6,40.4) ; v1(51.7,7.4) v1(51.7,8.1) HDR2.93@51.7,9.7 ; v1(51.7,57.1) HDR1.93@51.7,60.5 ; 51.7,59.2 52.5,59.2 ; v1(52.5,7.4) v1(52.5,8.1) HDR2.95@52.5,9.7 ; TP1.1@52.5,58.2 52.5,59.5 HDR1.95@52.5,60.5
VDRIVE: HDR1.20 U1.D20 | length 31
  lower w0.2: v1(22.1,70.2) 22.1,66.1 22.9,65.2 22.9,58.5 26.3,55.1 26.3,48 26.9,47.4 v1(27.6,47.4)
  Bottom Layer w0.2: HDR1.20@22.1,67.3 v1(22.1,70.2) ; v1(27.6,47.4) 28.4,47.4 28.6,47.6 28.6,48.4 U1.D20@29.1,48.9
VREF: HDR1.91 R4.1 R5.2 | length 15.4
  Top Layer w0.2: R5.2@49.85,54.6 48.9,54.6 48.8,54.7 48.8,58.8 49.6,59.9 ; v1(50.9,58.7) 49.6,59.9 ; R4.1@51.15,63.8 50.2,63.8 49.6,63.2 49.6,59.9
  Bottom Layer w0.2: v1(50.9,58.7) 50.9,58.6 HDR1.91@50.9,60.5
pads on no net: HDR1.MH1 HDR1.MH2 HDR1.MH3 HDR1.MH4 HDR1.MH5 HDR1.MH6 HDR2.MH1 HDR2.MH2 HDR2.MH3 HDR2.MH4 HDR2.MH5 HDR2.MH6 U1.A13 U1.A16 U1.AA4 U1.AA5 U1.AA6 U1.AA7 U1.AA8 U1.AA9 U1.AA10 U1.AA11 U1.AA14 U1.AA15 U1.AA18 U1.AA19 U1.AA20 U1.AA21 U1.AA22 U1.AA23 U1.AA24 U1.AB3 U1.AB4 U1.AB5 U1.AB6 U1.AB7 U1.AB8 U1.AB9 U1.AB10 U1.AB11 U1.AB12 U1.AB17 U1.AB18 U1.AB19 U1.AB20 U1.AB21 U1.AB22 U1.AB23 U1.AB24 U1.AB25 U1.AB26 U1.AC1 U1.AC2 U1.AC3 U1.AC4 U1.AC5 U1.AC6 U1.AC7 U1.AC8 U1.AC9 U1.AC10 U1.AC11 U1.AC13 U1.AC19 U1.AC20 U1.AC21 U1.AC22 U1.AC23 U1.AC24 U1.AC25 U1.AC26 U1.AC27 U1.AC28 U1.AD1 U1.AD2 U1.AD3 U1.AD4 U1.AD5 U1.AD7 U1.AD8 U1.AD10 U1.AD12 U1.AD13 U1.AD16 U1.AD17 U1.AD24 U1.AD25 U1.AD26 U1.AD27 U1.AD28 U1.AE1 U1.AE2 U1.AE11 U1.AE12 U1.AE13 U1.AE16 U1.AE17 U1.AE19 U1.AE25 U1.AE26 U1.AE27 U1.AE28 U1.AF1 U1.AF2 U1.AF7 U1.AF12 U1.AF13 U1.AF16 U1.AF17 U1.AF27 U1.AF28 U1.AG12 U1.AG13 U1.AG16 U1.AG17 U1.AH13 U1.AH16 U1.AH18 U1.B12 U1.B13 U1.B16 U1.B17 U1.C1 U1.C2 U1.C7 U1.C8 U1.C9 U1.C10 U1.C12 U1.C13 U1.C16 U1.C17 U1.C27 U1.C28 U1.D1 U1.D2 U1.D3 U1.D4 U1.D7 U1.D9 U1.D10 U1.D11 U1.D12 U1.D13 U1.D15 U1.D16 U1.D17 U1.D25 U1.D26 U1.D27 U1.D28 U1.E1 U1.E2 U1.E3 U1.E4 U1.E5 U1.E6 U1.E8 U1.E10 U1.E11 U1.E12 U1.E13 U1.E15 U1.E16 U1.E17 U1.E21 U1.E22 U1.E23 U1.E25 U1.E26 U1.E27 U1.E28 U1.F1 U1.F2 U1.F3 U1.F4 U1.F5 U1.F6 U1.F7 U1.F8 U1.F9 U1.F10 U1.F11 U1.F12 U1.F18 U1.F20 U1.F21 U1.F22 U1.F23 U1.F24 U1.F25 U1.F26 U1.F27 U1.F28 U1.G3 U1.G4 U1.G5 U1.G6 U1.G7 U1.G8 U1.G9 U1.G10 U1.G11 U1.G12 U1.G18 U1.G19 U1.G21 U1.G22 U1.G23 U1.G24 U1.G25 U1.G26 U1.H5 U1.H6 U1.H7 U1.H8 U1.H9 U1.H10 U1.H11 U1.H14 U1.H15 U1.H17 U1.H18 U1.H19 U1.H20 U1.H21 U1.H22 U1.H23 U1.H24 U1.J5 U1.J6 U1.J7 U1.J8 U1.J9 U1.J10 U1.J11 U1.J12 U1.J13 U1.J16 U1.J17 U1.J18 U1.J19 U1.J20 U1.J21 U1.J22 U1.J23 U1.J24 U1.K5 U1.K6 U1.K7 U1.K8 U1.K10 U1.K11 U1.K14 U1.K15 U1.K16 U1.K18 U1.K19 U1.K21 U1.K22 U1.K23 U1.K24 U1.L5 U1.L6 U1.L7 U1.L8 U1.L9 U1.L10 U1.L11 U1.L13 U1.L17 U1.L18 U1.L19 U1.L20 U1.L21 U1.L22 U1.L23 U1.L24 U1.M5 U1.M6 U1.M7 U1.M8 U1.M9 U1.M10 U1.M11 U1.M12 U1.M18 U1.M19 U1.M20 U1.M21 U1.M22 U1.M23 U1.N5 U1.N6 U1.N7 U1.N8 U1.N9 U1.N10 U1.N19 U1.N20 U1.N21 U1.N22 U1.N23 U1.N24 U1.N26 U1.P19 U1.R10 U1.T5 U1.T6 U1.T7 U1.T8 U1.T9 U1.T10 U1.T19 U1.T20 U1.T21 U1.T22 U1.T23 U1.U5 U1.U7 U1.U8 U1.U9 U1.U10 U1.U19 U1.U20 U1.U21 U1.U22 U1.U24 U1.U25 U1.V7 U1.V8 U1.V9 U1.V10 U1.V11 U1.V18 U1.V19 U1.V20 U1.V21 U1.V22 U1.W3 U1.W5 U1.W7 U1.W8 U1.W10 U1.W12 U1.W14 U1.W15 U1.W16 U1.W18 U1.W19 U1.W21 U1.W22 U1.W23 U1.W25 U1.Y5 U1.Y6 U1.Y7 U1.Y8 U1.Y9 U1.Y10 U1.Y11 U1.Y13 U1.Y16 U1.Y17 U1.Y18 U1.Y19 U1.Y20 U1.Y21 U1.Y22 U1.Y23 U1.Y24 U2.1 U5.1 U5.5 U5.9 U5.13 U5.16
copper on no net: | length 3.5
  Bottom Layer w0.254: 50.5,62.5 54,62.5

## Polygon pours and split planes (outlines as drawn)
VCC on Top Layer "Top Layer-VCC" (solid, remove dead copper, pour order 1000): 68.77,-0.049 68.77,82.651 -1.63,82.651 -1.63,0.155 68.77,0.155
GND on Bottom Layer "Bottom Layer-GND" (solid, remove dead copper, pour order 1001): 0.376,0.235 68.776,0.235 68.776,80.335 0.176,80.335 0.176,0.235
VCC on VCC_PLANE (split plane): 36.236,80.481 37.971,80.451 39.707,80.401 41.441,80.331 43.174,80.24 44.907,80.13 46.638,80 48.367,79.85 50.095,79.68 51.82,79.49 53.543,79.28 55.264,79.05 56.982,78.8 58.696,78.53 60.408,78.241 62.116,77.932 63.82,77.603 65.521,77.255 67.217,76.887 68.489,76.595 68.489,0.511 0.511,0.511 0.511,76.595 1.783,76.887 3.479,77.255 5.18,77.603 6.884,77.932 8.592,78.241 10.304,78.53 12.018,78.8 13.736,79.05 15.457,79.28 17.18,79.49 18.905,79.68 20.633,79.85 22.362,80 24.093,80.13 25.826,80.24 27.559,80.331 29.293,80.401 31.029,80.451 32.764,80.481 34.5,80.491
VCCINT on VCC_PLANE (split plane): 293 vertices, not listed, extent 13.756,6.556 59.844,60.044
VCCA_PLL1 on VCC_PLANE (split plane): 20.344,40.5 20.353,40.434 20.378,40.372 20.419,40.319 21.019,39.719 21.072,39.678 21.134,39.653 21.2,39.644 27.844,39.644 27.844,39.156 27.4,39.156 27.382,39.154 27.364,39.154 26.682,39.056 17.1,39.056 17.034,39.047 16.972,39.022 16.919,38.981 16.878,38.928 16.853,38.866 16.844,38.8 16.844,37.9 16.853,37.834 16.878,37.772 16.919,37.719 16.972,37.678 17.034,37.653 17.1,37.644 26.844,37.644 26.844,37.156 20.6,37.156 20.534,37.147 20.49,37.129 20.472,37.122 20.419,37.081 19.819,36.481 19.778,36.428 19.753,36.366 19.744,36.3 19.744,34.756 10.156,34.756 10.156,43.244 20.344,43.244
VCCA_PLL3 on VCC_PLANE (split plane): 60.144,39.856 57.9,39.856 57.834,39.847 57.772,39.822 57.719,39.781 57.678,39.728 57.653,39.666 57.644,39.6 57.644,35.856 56.5,35.856 56.434,35.847 56.372,35.822 56.319,35.781 56.278,35.728 56.253,35.666 56.244,35.6 56.244,34.36 49.756,34.453 49.756,36.5 49.756,36.502 49.756,36.504 49.752,36.535 49.747,36.566 49.747,36.568 49.746,36.57 49.734,36.599 49.722,36.628 49.721,36.63 49.72,36.632 49.42,37.132 49.4,37.156 49.381,37.181 49.379,37.182 49.378,37.184 49.353,37.203 49.328,37.222 49.326,37.223 49.324,37.224 49.295,37.235 49.266,37.247 49.264,37.248 49.262,37.249 49.231,37.252 49.2,37.256 48.2,37.256 48.191,37.255 48.183,37.256 48.158,37.251 48.134,37.247 48.126,37.244 48.117,37.243 48.095,37.231 48.072,37.222 48.065,37.217 48.057,37.213 48.039,37.196 48.019,37.181 48.014,37.174 48.007,37.169 47.386,36.459 42.784,36.554 42.256,36.932 42.256,37.944 54.5,37.944 54.566,37.953 54.628,37.978 54.681,38.019 54.722,38.072 54.747,38.134 54.756,38.2 54.756,38.5 54.747,38.566 54.722,38.628 54.681,38.681 54.628,38.722 54.566,38.747 54.5,38.756 42.256,38.756 42.256,39.605 43.318,40.844 47.844,40.844 47.844,40.2 47.853,40.134 47.871,40.09 47.878,40.072 47.919,40.019 48.219,39.719 48.272,39.678 48.334,39.653 48.391,39.645 48.4,39.644 49.1,39.644 49.131,39.648 49.162,39.651 49.164,39.652 49.166,39.653 49.195,39.665 49.224,39.676 49.226,39.677 49.228,39.678 49.253,39.697 49.278,39.716 49.279,39.718 49.281,39.719 49.3,39.744 49.32,39.768 49.62,40.268 49.621,40.27 49.622,40.272 49.634,40.301 49.646,40.33 49.647,40.332 49.647,40.334 49.652,40.365 49.656,40.396 49.656,40.398 49.656,40.4 49.656,42.544 60.144,42.544
VCCA_PLL5 on VCC_PLANE (split plane): 39.244,53.356 36.9,53.356 36.834,53.347 36.772,53.322 36.719,53.281 36.678,53.228 36.653,53.166 36.644,53.1 36.644,50.717 36.348,48.545 36.154,47.673 35.922,47.056 35.306,47.056 34.941,47.421 35.502,48.143 35.511,48.158 35.522,48.172 35.528,48.187 35.536,48.2 35.541,48.217 35.547,48.234 35.55,48.25 35.554,48.265 35.554,48.283 35.556,48.3 35.556,53.1 35.547,53.166 35.522,53.228 35.481,53.281 35.428,53.322 35.366,53.347 35.3,53.356 35.25,53.35 35.2,53.356 31.556,53.356 31.556,59.844 39.244,59.844
VCCA_PLL6 on VCC_PLANE (split plane): 35.844,24.7 35.853,24.634 35.878,24.572 35.919,24.519 35.972,24.478 36.034,24.453 36.1,24.444 37.844,24.444 37.844,23.656 35.8,23.656 35.734,23.647 35.672,23.622 35.619,23.581 35.578,23.528 35.553,23.466 35.544,23.4 35.544,18.656 31.956,18.656 31.956,23.444 33.5,23.444 33.526,23.447 33.552,23.449 33.559,23.452 33.566,23.453 33.591,23.463 33.616,23.471 33.621,23.475 33.628,23.478 33.649,23.494 33.671,23.509 33.675,23.514 33.681,23.519 33.697,23.54 33.714,23.56 33.718,23.566 33.722,23.572 33.732,23.596 33.743,23.62 33.745,23.627 33.747,23.634 33.751,23.66 33.756,23.686 33.942,27.044 35.844,27.044
GND on GND_PLANE (split plane): 36.236,80.481 37.971,80.451 39.707,80.401 41.441,80.331 43.174,80.24 44.907,80.13 46.638,80 48.367,79.85 50.095,79.68 51.82,79.49 53.543,79.28 55.264,79.05 56.982,78.8 58.696,78.53 60.408,78.241 62.116,77.932 63.82,77.603 65.521,77.255 67.217,76.887 68.489,76.595 68.489,0.511 0.511,0.511 0.511,76.595 1.783,76.887 3.479,77.255 5.18,77.603 6.884,77.932 8.592,78.241 10.304,78.53 12.018,78.8 13.736,79.05 15.457,79.28 17.18,79.49 18.905,79.68 20.633,79.85 22.362,80 24.093,80.13 25.826,80.24 27.559,80.331 29.293,80.401 31.029,80.451 32.764,80.481 34.5,80.491

## Keep-outs
Top Layer:
  circle w0.2: c10.4,21 r1.5
  circle w0.2: c61.8,53.6 r1.5
Bottom Layer:
  circle w0.2: c51.1,50.9 r1.5
  circle w0.2 net FPGA_CLK: c17.5,24.9 r1.5
  circle w0.2: c4.3,56.9 r1.5
  circle w0.2: c62.9,27.4 r1.5
Keep-Out Layer:
  the board outline again, w1.8

## Other copper
VCC_PLANE (plane layer: these items are gaps in the copper):
  lines w0.254: 36.6,60.1 39.5,60.1 ; 42,39.7 42.1,39.9 ; 49.4,42.8 49.5,42.8
  lines w0.508: 19.8,43.5 20.6,43.5 ; 35.2,53.1 34.5,53.1 31.3,53.1 31.3,60.1 39.5,60.1 39.5,53.1 36.9,53.1 36.9,50.7 36.6,48.5 36.4,47.6 36.1,46.8 35.2,46.8 34.6,47.4 35.3,48.3 35.3,53.1 ; 42,38.5 54.5,38.5 54.5,38.2 42,38.2 ; 49.4,42.8 49.4,40.4 49.1,39.9 48.4,39.9 48.1,40.2 48.1,41.1 43.2,41.1 42,39.7 42,38.2 ; 49.5,42.8 60.4,42.8 60.4,39.6 57.9,39.6 57.9,35.6 56.5,35.6 56.5,34.1 49.5,34.2 49.5,36.5 49.2,37 48.2,37 47.5,36.2 42.7,36.3 42,36.8 42,38.2 ; 20.6,43.5 9.9,43.5 9.9,34.5 20,34.5 20,36.3 20.6,36.9 27.1,36.9 27.1,37.9 17.1,37.9 17.1,38.8 26.7,38.8 27.4,38.9 28.1,38.9 28.1,39.9 21.2,39.9 20.6,40.5 20.6,43.5 ; 13.5,29.4 13.5,32 16.8,32 17.3,32.4 27.5,32.4 29.3,34.2 29.3,43.4 37.3,43.4 37.3,44.5 43.5,54 43.5,57.8 45.9,57.8 47.1,60.3 59,60.3 59,57 59,53.4 50.6,53.5 47.1,53.5 45.3,50.6 45.3,47.3 60.1,47.3 60.1,44.7 57.1,44.7 57.1,45.4 43,45.4 43,43.5 38.9,39.3 38.9,36.9 42.6,33.4 43.7,29.4 43.8,25.8 45.6,20.3 49.8,13.2 54.4,6.3 49.9,6.3 42.2,20.9 36.9,20.9 36.9,22.3 41.3,22.3 39.4,26.1 39.3,29.9 39.3,31.3 36.6,34.4 33.6,34.4 32.6,32.4 32.6,31.4 29.7,31.4 28,29.4 13.5,29.4 ; 31.7,18.4 31.7,23.7 33.5,23.7 33.7,27.3 36.1,27.3 36.1,24.7 38.1,24.7 38.1,23.4 35.8,23.4 35.8,18.4 31.7,18.4

## Silkscreen, mask and mechanical layers (free items; w line width, h text height)
Top Overlay:
  lines w0.08: 33.5,74.6 34.8,74.2 ; 34.079,40.221 34.079,41.92 ; 34.1,34 34.1,34.9 ; 43,75.1 43.5,75.9 ; 46.1,74.4 46.8,74.8 ; 51.1,73.2 51.7,73.2 ; 52.6,59.2 52.9,60.1 ; 53.4,71.2 54,71.2 ; 56.3,8.1 56.9,8.5 ; 62.5,49.7 63,50.1 ; 62.6,57.8 63.1,58.2
  text "(TMS)" at 46.2,75.7 h0.8
  text "(TCK)" at 49.4,74.5 h0.8
  text "(TDO)" at 30.8,73.1 h0.8
  text "(TDI)" at 54.6,72.8 h0.8
  text "(+3V3)" at 56.5,70.8 h0.8
  text "(+1V5)" at 55.4,59.9 h0.8
  text "(+5V)" at 63.2,56.5 h0.8
  text "(TRST)" at 63,48.6 h0.8
  text "(+5V)" at 57,6.8 h0.8
  text "(CONFIG)" at 17,1.8 h0.8
  text "(POWER)" at 47.3,1.8 h0.8
Bottom Overlay:
  drawing of 850 lines, arcs and shapes, not listed
  text "REV 1.00" at 47.6,76.5 h1.3
  text "NBP6" at 54.5,76.5 h1.3
  text "1" at 13.97,58.42 h1
  text "1" at 14.224,7.62 h1
PCB Boundary:
  the board outline again, w0.25
  text "PCB boundary coincides with centre-line of tracks and arc" at 0,-12 h0.75
Gerber ID:
  text ".Layer_Name" at 0,-13.8 h0.75
Printout ID:
  text ".Printout_Name" at 0,-10 h0.75
Drill Drawing:
  text ".Legend" at -0.2,-15.6 h0.75